# EAGLE board EsquematicoPractica1 (EAGLE 8.6.2), part 1 of 2
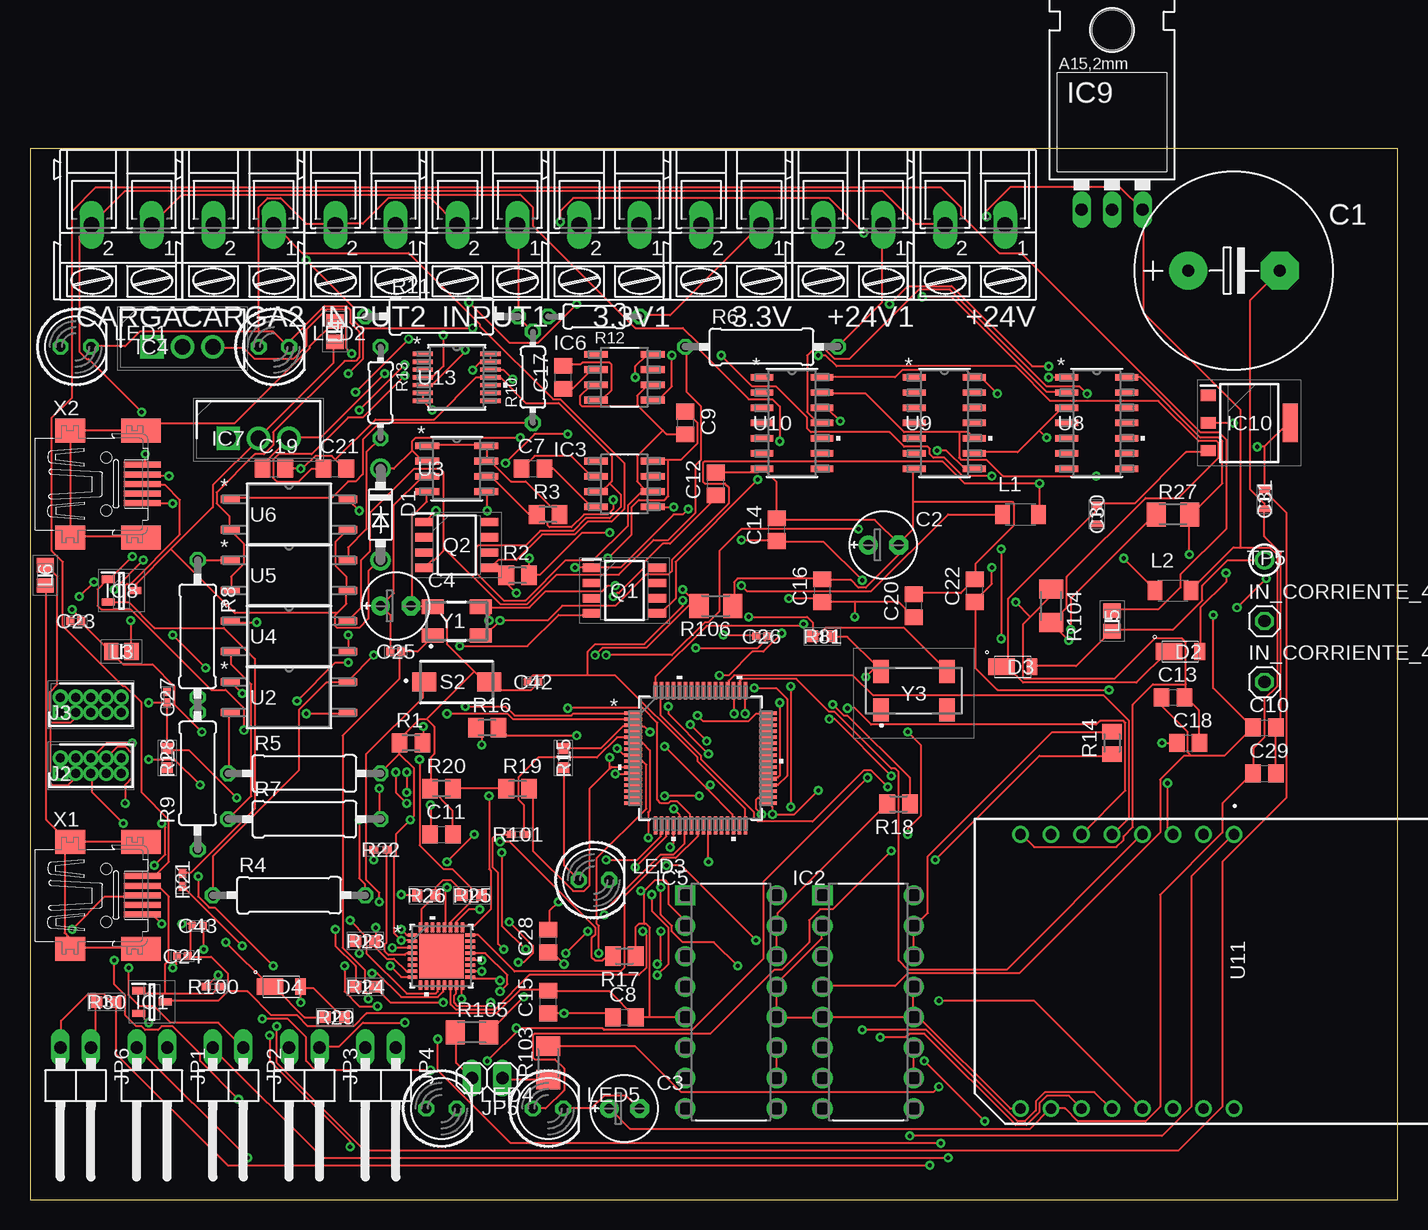
[diagram p0: board, top side]
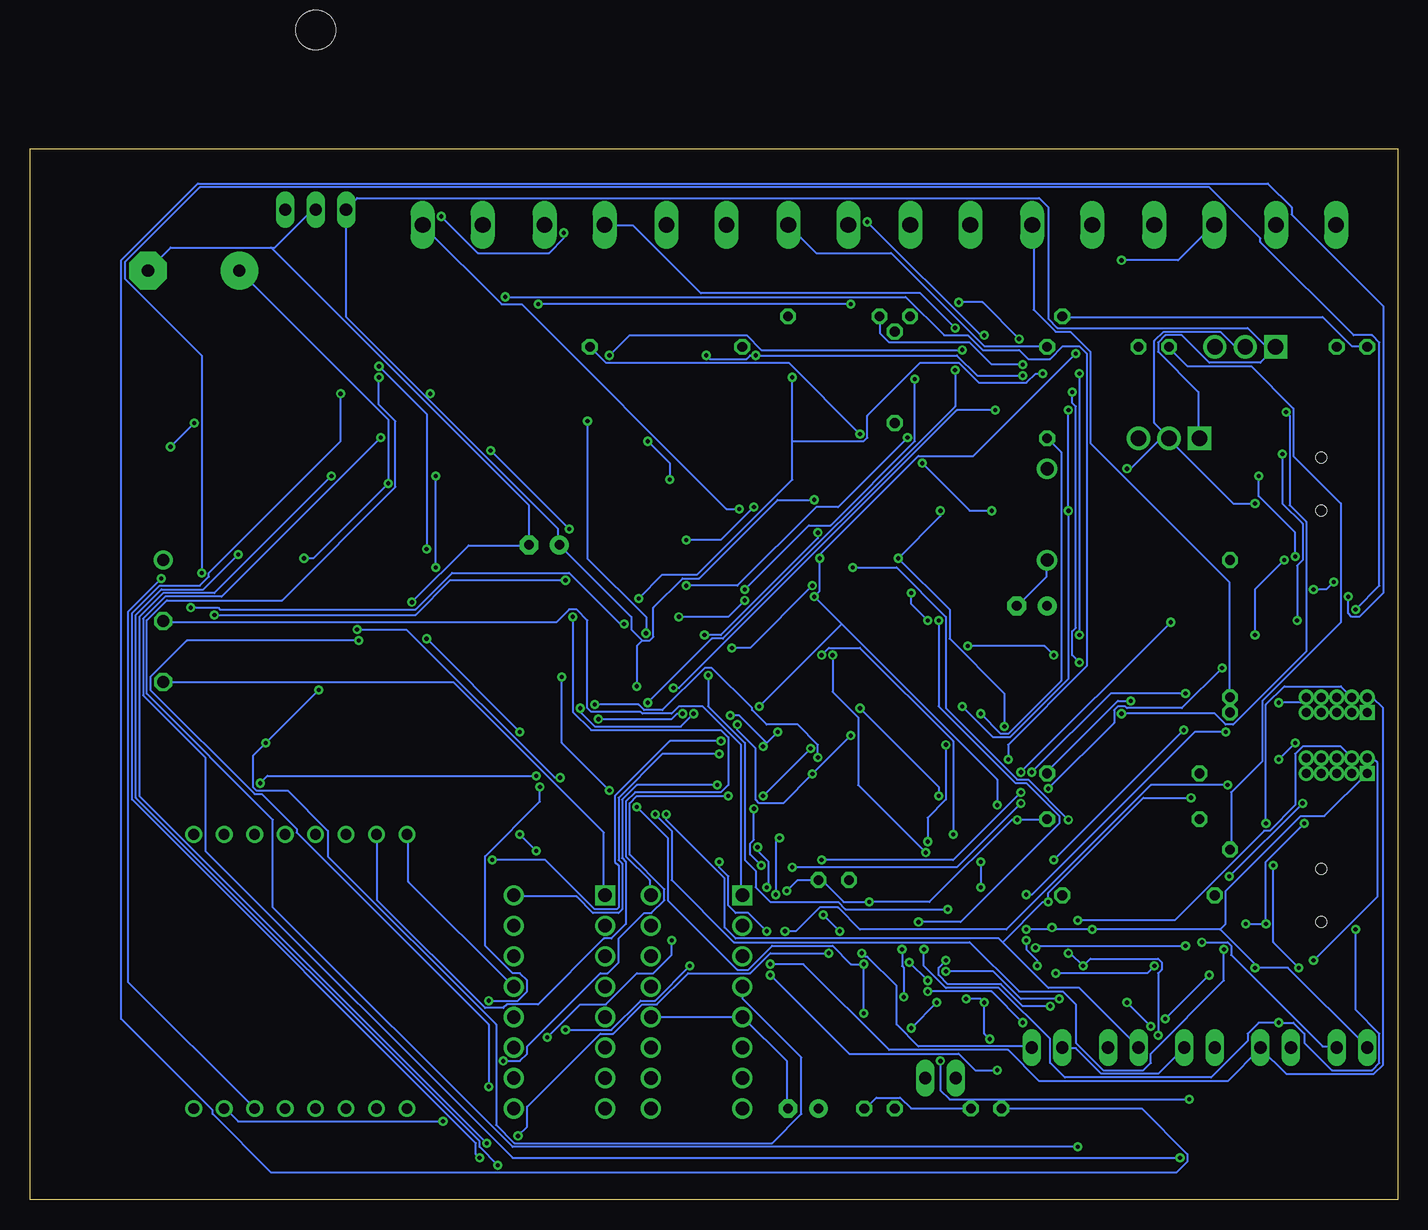
[diagram p1: board, bottom side, seen from below]

Size 113.97 x 87.62 mm. Coordinates in mm from the lower left corner, seen from the top.
Outline: 0,0 113.97,0 113.97,87.62 0,87.62 0,0
Copper layers (1*16): Top 0.035mm / dielectric 1.5mm / Bottom 0.035mm
Design rules "default": minimum track width 6mil, minimum drill 0.35mm, track to track 6mil, track to pad 6mil, pad to pad 6mil, via to via 6mil, smd to smd 6mil, copper to edge 40mil, drill to drill 6mil, minimum pad ring 10mil, minimum via ring 8mil, stop-mask expansion 4mil, vias tented up to drill 0mil, thermal gap 10mil

## Footprints (pad centres in the part's own frame; a part is rotated, then mirrored left to right if it is on the bottom)
AK300/2 = drill 1.321 long: 1 -2.515,0; 2 2.489,0
E7,5-16 = drill 1.016 pad 3.15: + -3.81,0 | drill 1.016 pad 3.15 octagon: - 3.81,0
E2,5-6E = drill 0.813 pad 1.575: + -1.27,0 | drill 0.813 pad 1.575 octagon: - 1.27,0
C0805 = smd 1.3 x 1.5: 1 -0.95,0; 2 0.95,0
CAPC1005X56N = smd 0.65 x 0.64: 1 -0.45,0; 2 0.45,0
CAPC1005X55N = smd 0.65 x 0.62: 1 -0.44,0; 2 0.44,0
CAPC1608X80N = smd 0.54 x 0.94: 1 -0.8,0; 2 0.8,0
CAPC1005X55N' = smd 0.6 x 0.62: 1 -0.46,0; 2 0.46,0
DO41-7.6 = drill 1.1 pad 1.7: A 3.81,0; C -3.81,0
POWERDI_123 = smd 2.2 x 1.4: 1 -1.6,0 | smd 0.9 x 1.4: 2 0.95,0
SOT95P248X115-3N = smd 1.1 x 0.6: 1 -1.1,0.95; 2 -1.1,-0.95; 3 1.1,0
DIP254P762X508-16 = drill 1.118 pad 1.676 square: 1 -7.62,17.78 | drill 1.118 pad 1.676: 2 -7.62,15.24; 3 -7.62,12.7; 4 -7.62,10.16; 5 -7.62,7.62; 6 -7.62,5.08; 7 -7.62,2.54; 8 -7.62,0; 9 0,0; 10 0,2.54; 11 0,5.08; 12 0,7.62; 13 0,10.16; 14 0,12.7; 15 0,15.24; 16 0,17.78
SOIC127P600X175-8N = smd 1.981 x 0.559: 1 -2.362,1.905; 2 -2.362,0.635; 3 -2.362,-0.635; 4 -2.362,-1.905; 5 2.362,-1.905; 6 2.362,-0.635; 7 2.362,0.635; 8 2.362,1.905
TO254P482X997X2018-3P = drill 1.29 pad 1.935 square: 1 0,0 | drill 1.29 pad 1.935: 2 2.54,0; 3 5.08,0
78XXL = drill 1.016 long: GND 0,-3.81; IN -2.54,-3.81; OUT 2.54,-3.81 | hole 3.302: 0,11.176
SOT230P700X180-4N = smd 1.25 x 0.95: 1 -3.4,2.3; 2 -3.4,0; 3 -3.4,-2.3 | smd 1.25 x 3.2: 4 3.4,0
1X01 = drill 1.016 octagon: 1 0,0
HDRV10W40P127_2X5_635X345X415P = drill 0.75 pad 1.15 square: 1 0,0 | drill 0.75 pad 1.15: 2 0,1.27; 3 1.27,0; 4 1.27,1.27; 5 2.54,0; 6 2.54,1.27; 7 3.81,0; 8 3.81,1.27; 9 5.08,0; 10 5.08,1.27
1X02/90 = drill 1.016 long: 1 -1.27,-3.81; 2 1.27,-3.81
1X02 = drill 1.016 long: 1 -1.27,0; 2 1.27,0
L3216C = smd 1.2 x 1.6: 1 -1.5,0; 2 1.5,0
INDC2012X105N = smd 1.2 x 1.45: 1 -0.85,0; 2 0.85,0
LED5MM = drill 0.813 octagon: A -1.27,0; K 1.27,0
SOIC127P600X175-8N' = smd 1.525 x 0.7: 1 -2.712,1.905; 2 -2.712,0.635; 3 -2.712,-0.635; 4 -2.712,-1.905; 5 2.712,-1.905; 6 2.712,-0.635; 7 2.712,0.635; 8 2.712,1.905
M0805 = smd 1.3 x 1.6: 1 -0.95,0; 2 0.95,0
0309/12 = drill 0.813 octagon: 1 -6.35,0; 2 6.35,0
0204/7 = drill 0.813 octagon: 1 -3.81,0; 2 3.81,0
RESC1608X55N = smd 0.9 x 0.95: 1 -0.8,0; 2 0.8,0
RESC1005X40N = smd 0.75 x 0.6: 1 -0.55,0; 2 0.55,0
RESC1608X50N = smd 0.85 x 1: 1 -0.75,0; 2 0.75,0
M1206 = smd 1.6 x 2: 1 -1.4,0; 2 1.4,0
EVQPE1 = smd 2 x 1.6: 1 -2.7,0; 2 2.7,0
5002 = drill 1.02 pad 1.6: 1 0,0
98ASS23234W = smd 1.473 x 0.279: 1 -5.613,3.75; 2 -5.613,3.25; 3 -5.613,2.75; 4 -5.613,2.25; 5 -5.613,1.75; 6 -5.613,1.25; 7 -5.613,0.75; 8 -5.613,0.25; 9 -5.613,-0.25; 10 -5.613,-0.75; 11 -5.613,-1.25; 12 -5.613,-1.75; 13 -5.613,-2.25; 14 -5.613,-2.75; 15 -5.613,-3.25; 16 -5.613,-3.75; 33 5.613,-3.75; 34 5.613,-3.25; 35 5.613,-2.75; 36 5.613,-2.25; 37 5.613,-1.75; 38 5.613,-1.25; 39 5.613,-0.75; 40 5.613,-0.25; 41 5.613,0.25; 42 5.613,0.75; 43 5.613,1.25; 44 5.613,1.75; 45 5.613,2.25; 46 5.613,2.75; 47 5.613,3.25; 48 5.613,3.75 | smd 0.279 x 1.473: 17 -3.75,-5.613; 18 -3.25,-5.613; 19 -2.75,-5.613; 20 -2.25,-5.613; 21 -1.75,-5.613; 22 -1.25,-5.613; 23 -0.75,-5.613; 24 -0.25,-5.613; 25 0.25,-5.613; 26 0.75,-5.613; 27 1.25,-5.613; 28 1.75,-5.613; 29 2.25,-5.613; 30 2.75,-5.613; 31 3.25,-5.613; 32 3.75,-5.613; 49 3.75,5.613; 50 3.25,5.613; 51 2.75,5.613; 52 2.25,5.613; 53 1.75,5.613; 54 1.25,5.613; 55 0.75,5.613; 56 0.25,5.613; 57 -0.25,5.613; 58 -0.75,5.613; 59 -1.25,5.613; 60 -1.75,5.613; 61 -2.25,5.613; 62 -2.75,5.613; 63 -3.25,5.613; 64 -3.75,5.613
SMD-4_VO-L = smd 1.549 x 0.61: 1 -4.902,1.27; 2 -4.902,-1.27; 3 4.902,-1.27; 4 4.902,1.27
D8 = smd 1.981 x 0.559: 1 -2.464,1.905; 2 -2.464,0.635; 3 -2.464,-0.635; 4 -2.464,-1.905; 5 2.464,-1.905; 6 2.464,-0.635; 7 2.464,0.635; 8 2.464,1.905
QFN-32_5X5X0.9 = smd 0.805 x 0.3: 1 -2.402,1.75; 2 -2.402,1.25; 3 -2.402,0.75; 4 -2.402,0.25; 5 -2.402,-0.25; 6 -2.402,-0.75; 7 -2.402,-1.25; 8 -2.402,-1.75; 17 2.402,-1.75; 18 2.402,-1.25; 19 2.402,-0.75; 20 2.402,-0.25; 21 2.402,0.25; 22 2.402,0.75; 23 2.402,1.25; 24 2.402,1.75 | smd 0.3 x 0.805: 9 -1.75,-2.402; 10 -1.25,-2.402; 11 -0.75,-2.402; 12 -0.25,-2.402; 13 0.25,-2.402; 14 0.75,-2.402; 15 1.25,-2.402; 16 1.75,-2.402; 25 1.75,2.402; 26 1.25,2.402; 27 0.75,2.402; 28 0.25,2.402; 29 -0.25,2.402; 30 -0.75,2.402; 31 -1.25,2.402; 32 -1.75,2.402 | smd 3.7 x 3.7: 33 0,0
SOT108-1 = smd 1.905 x 0.533: 1 -2.502,3.81; 2 -2.502,2.54; 3 -2.502,1.27; 4 -2.502,0; 5 -2.502,-1.27; 6 -2.502,-2.54; 7 -2.502,-3.81; 8 2.502,-3.81; 9 2.502,-2.54; 10 2.502,-1.27; 11 2.502,0; 12 2.502,1.27; 13 2.502,2.54; 14 2.502,3.81
MIKROE-971_1 = drill 0.889 pad 1.35: 1 -11.43,21.59; 2 -11.43,19.05; 3 -11.43,16.51; 4 -11.43,13.97; 5 -11.43,11.43; 6 -11.43,8.89; 7 -11.43,6.35; 8 -11.43,3.81; 9 11.43,3.81; 10 11.43,6.35; 11 11.43,8.89; 12 11.43,11.43; 13 11.43,13.97; 14 11.43,16.51; 15 11.43,19.05; 16 11.43,21.59
PW14 = smd 1.676 x 0.356: 1 -2.819,1.95; 2 -2.819,1.3; 3 -2.819,0.65; 4 -2.819,0; 5 -2.819,-0.65; 6 -2.819,-1.3; 7 -2.819,-1.95; 8 2.819,-1.95; 9 2.819,-1.3; 10 2.819,-0.65; 11 2.819,0; 12 2.819,0.65; 13 2.819,1.3; 14 2.819,1.95
32005-201 = smd 3.1 x 0.5: 1 3,1.6; 2 3,0.8; 3 3,0; 4 3,-0.8; 5 3,-1.6 | smd 2.5 x 2: M1 -3,-4.45; M2 -3,4.45 | smd 3.3 x 2: M3 2.9,4.45; M4 2.9,-4.45 | hole 0.9: 0,2.2; 0,-2.2
ABM3B = smd 1.8 x 1.2: 1 -2,-1.2; 2 2,-1.2; 3 2,1.2; 4 -2,1.2
ABS2532768KHZT = smd 1.3 x 1.9: 1 -2.75,-1.05; 2 2.75,-1.05; 3 2.75,2.15; 4 -2.75,2.15

## Placement (x,y rotation side)
3.3V  [AK300/2]  58.42,81.28 180 top
3.3V1  [AK300/2]  48.26,81.28 180 top
+24V  [AK300/2]  78.74,81.28 180 top
+24V1  [AK300/2]  68.58,81.28 180 top
C1  470uF  [E7,5-16]  100.33,77.47 0 top
C2  100uF  [E2,5-6E]  71.12,54.61 0 top
C3  100uF  [E2,5-6E]  49.53,7.62 0 top
C4  470pF  [E2,5-6E]  30.48,49.53 0 top
C7  10u  [C0805]  41.91,60.96 0 top
C8  0.33u  [C0805]  49.53,15.24 0 top
C9  0.1u  [C0805]  54.61,64.77 270 top
C10  10u  [C0805]  102.87,39.37 0 top
C11  1u  [C0805]  34.29,30.48 0 top
C12  0.1u  [C0805]  57.15,59.69 90 top
C13  1u  [C0805]  95.25,41.91 0 top
C14  0.1u  [C0805]  62.23,55.88 90 top
C15  0.33u  [C0805]  43.18,16.51 90 top
C16  0.1u  [C0805]  66.04,50.8 90 top
C17  10u  [C0805]  44.45,68.58 90 top
C18  10u  [C0805]  96.52,38.1 0 top
C19  1u  [C0805]  20.32,60.96 0 top
C20  0.1u  [C0805]  73.66,49.53 90 top
C21  1u  [C0805]  25.4,60.96 0 top
C22  0.1u  [C0805]  78.74,50.8 90 top
C23  0402ZD105KAT2A  [CAPC1005X56N]  3.81,48.26 0 top
C24  0402ZD105KAT2A  [CAPC1005X56N]  12.7,20.32 180 top
C25  04025A220JAT2A  [CAPC1005X56N]  30.48,45.72 180 top
C26  04025A220JAT2A  [CAPC1005X56N]  60.96,46.99 180 top
C27  C0402C104K8PAC  [CAPC1005X55N]  11.43,41.91 90 top
C28  0.33u  [C0805]  43.18,21.59 90 top
C29  0.1u  [C0805]  102.87,35.56 0 top
C30  C1608X5R1A106M080AC  [CAPC1608X80N]  88.9,57.15 90 top
C31  C1608X5R1A106M080AC  [CAPC1608X80N]  102.87,58.42 90 top
C42  12PF  [CAPC1005X55N']  41.91,43.18 0 top
C43  12PF  [CAPC1005X55N']  13.97,22.86 180 top
CARGA  [AK300/2]  7.62,81.28 180 top
CARGA2  [AK300/2]  17.78,81.28 180 top
D1  1N5819-B  [DO41-7.6]  29.21,57.15 270 top
D2  DFLS130L-7  [POWERDI_123]  96.52,45.72 0 top
D3  DFLS130L-7  [POWERDI_123]  82.55,44.45 0 top
D4  DFLS130L-7  [POWERDI_123]  21.59,17.78 0 top
IC1  GSOT05C-GS08  [SOT95P248X115-3N]  10.16,16.51 0 top
IC2  RCV420JP  [DIP254P762X508-16]  73.66,7.62 0 top
IC3  TC7662BEOA  [SOIC127P600X175-8N]  49.53,59.69 0 top
IC4  MC7812BTG  [TO254P482X997X2018-3P]  10.16,71.12 0 top
IC5  RCV420JP  [DIP254P762X508-16]  62.23,7.62 0 top
IC6  TC7662BEOA  [SOIC127P600X175-8N]  49.53,68.58 0 top
IC7  MC7812BTG  [TO254P482X997X2018-3P]  16.51,63.5 0 top
IC8  GSOT05C-GS08  [SOT95P248X115-3N]  7.62,50.8 0 top
IC9  [78XXL]  90.17,86.36 0 top
IC10  NCP1117ST33T3G  [SOT230P700X180-4N]  101.6,64.77 0 top
IN_CORRIENTE_4-1  [1X01]  102.87,48.26 0 top
IN_CORRIENTE_4-20  [1X01]  102.87,43.18 0 top
INPUT1  [AK300/2]  38.1,81.28 180 top
INPUT2  [AK300/2]  27.94,81.28 180 top
J2  M50-3500542  [HDRV10W40P127_2X5_635X345X415P]  2.54,35.56 0 top
J3  M50-3500542  [HDRV10W40P127_2X5_635X345X415P]  2.54,40.64 0 top
JP1  [1X02/90]  10.16,8.89 180 top
JP2  [1X02/90]  16.51,8.89 180 top
JP3  [1X02/90]  22.86,8.89 180 top
JP4  [1X02/90]  29.21,8.89 180 top
JP5  [1X02]  38.1,10.16 180 top
JP6  [1X02/90]  3.81,8.89 180 top
L1  220uH  [L3216C]  82.55,57.15 0 top
L2  1uH  [L3216C]  95.25,50.8 0 top
L3  MPZ2012S331A  [INDC2012X105N]  7.62,45.72 180 top
L4  MPZ2012S331A  [INDC2012X105N]  25.4,72.39 270 top
L5  MPZ2012S331A  [INDC2012X105N]  90.17,48.26 270 top
L6  MPZ2012S331A  [INDC2012X105N]  1.27,52.07 90 top
LED1  [LED5MM]  3.81,71.12 0 top
LED2  [LED5MM]  20.32,71.12 0 top
LED3  [LED5MM]  46.99,26.67 0 top
LED4  [LED5MM]  34.29,7.62 0 top
LED5  [LED5MM]  43.18,7.62 0 top
Q1  IRF7416PBF  [SOIC127P600X175-8N']  49.53,50.8 0 top
Q2  IRF7416PBF  [SOIC127P600X175-8N']  35.56,54.61 0 top
R1  1K  [M0805]  31.75,38.1 0 top
R2  1.64K  [M0805]  40.64,52.07 0 top
R3  0.33R  [M0805]  43.18,57.15 0 top
R4  10K  [0309/12]  21.59,25.4 0 top
R5  1K  [0309/12]  22.86,35.56 0 top
R6  10K  [0309/12]  60.96,71.12 0 top
R7  1K  [0309/12]  22.86,31.75 0 top
R8  220  [0309/12]  13.97,46.99 270 top
R9  1k  [0309/12]  13.97,35.56 90 top
R10  220  [0204/7]  41.91,68.58 90 top
R11  1k  [0309/12]  34.29,73.66 0 top
R12  10K  [0204/7]  46.99,73.66 180 top
R13  10K  [0204/7]  29.21,67.31 270 top
R14  10K  [M0805]  90.17,38.1 90 top
R15  RK73B1JTTD221J  [RESC1608X55N]  44.45,36.83 90 top
R16  10K  [M0805]  38.1,39.37 0 top
R17  10k  [M0805]  49.53,20.32 180 top
R18  10K  [M0805]  72.39,33.02 180 top
R19  10K  [M0805]  40.64,34.29 0 top
R20  10k  [M0805]  34.29,34.29 0 top
R21  33  [RESC1005X40N]  12.7,26.67 270 top
R22  33  [RESC1005X40N]  29.21,29.21 0 top
R23  RK73B1JLTD103J  [RESC1608X55N]  27.94,21.59 0 top
R24  RK73B1JLTD103J  [RESC1608X55N]  27.94,17.78 0 top
R25  RK73B1JLTD103J  [RESC1608X55N]  36.83,25.4 0 top
R26  CRCW06034K70JNEA  [RESC1608X50N]  33.02,25.4 0 top
R27  10K  [M1206]  95.25,57.15 0 top
R28  RK73B1JLTD103J  [RESC1608X55N]  11.43,36.83 90 top
R29  RK73Z1JTTD  [RESC1608X55N]  25.4,15.24 180 top
R30  RK73Z1JTTD  [RESC1608X55N]  6.35,16.51 0 top
R81  10M  [RESC1608X55N]  66.04,46.99 0 top
R100  33  [RESC1005X40N]  15.24,17.78 180 top
R101  33  [RESC1005X40N]  40.64,30.48 0 top
R103  6.7K  [M1206]  43.18,11.43 90 top
R104  3.3K  [M1206]  85.09,49.53 270 top
R105  5.7K  [M1206]  36.83,13.97 0 top
R106  3.3K  [M1206]  57.15,49.53 180 top
S2  EVQPE105K  [EVQPE1]  35.56,43.18 0 top
TP5  5002  [5002]  102.87,53.34 0 top
U1  MKL27Z64VLH4  [98ASS23234W]  55.88,36.83 0 top
U2  SFH6156-4TSMD-4_VO-L  [SMD-4_VO-L]  21.59,41.91 0 top
U3  MC34063ADR  [D8]  35.56,60.96 0 top
U4  SFH6156-4TSMD-4_VO-L  [SMD-4_VO-L]  21.59,46.99 0 top
U5  SFH6156-4TSMD-4_VO-L  [SMD-4_VO-L]  21.59,52.07 0 top
U6  SFH6156-4TSMD-4_VO-L  [SMD-4_VO-L]  21.59,57.15 0 top
U7  MK20DX128VFM5  [QFN-32_5X5X0.9]  34.29,20.32 0 top
U8  74LVC125AD  [SOT108-1]  88.9,64.77 0 top
U9  74LVC125AD  [SOT108-1]  76.2,64.77 0 top
U10  74LVC125AD  [SOT108-1]  63.5,64.77 0 top
U11  MIKROE-971  [MIKROE-971_1]  78.74,19.05 270 top
U13  TLV274QPWRG4Q1  [PW14]  35.56,68.58 0 top
X1  MINI-USB-SCHIELD-32005-201  [32005-201]  6.35,25.4 0 top
X2  MINI-USB-SCHIELD-32005-201  [32005-201]  6.35,59.69 0 top
Y1  ABM3B-8.000MHZ-B2-T  [ABM3B]  35.56,48.26 0 top
Y3  32.768KHZ  [ABS2532768KHZT]  73.66,41.91 0 top

## Library data of the parts
3.3V 3.3V1 +24V +24V1 CARGA CARGA2 INPUT1 INPUT2 = con-ptr500; OC_FARNELL: unknown; OC_NEWARK: unknown
C1-C4 L1 L2 = rcl
C7-C22 C28 C29 = rcl; SPICEPREFIX: C
C23 C24 = 0402ZD105KAT2A; DESCRIPTION: AVX - 0402ZD105KAT2A - CAP, MLCC, X5R, 1UF, 10V, 0402; HEIGHT: 0.56mm; MANUFACTURER_NAME: AVX; MANUFACTURER_PART_NUMBER: 0402ZD105KAT2A; RS_PART_NUMBER: 8882699; RS_PRICE/STOCK: http://uk.rs-online.com/web/p/products/8882699
C25 C26 = 04025A220JAT2A; DESCRIPTION: Capacitor MLCC 0402 22pF 50V AVX 0402 Standard 22pF Ceramic Multilayer Capacitor, 50 V dc C0G Dielectric 5% SMD; HEIGHT: 0.56mm; MANUFACTURER_NAME: AVX; MANUFACTURER_PART_NUMBER: 04025A220JAT2A; RS_PART_NUMBER: 1243267; RS_PRICE/STOCK: http://uk.rs-online.com/web/p/products/1243267
C27 = C0402C104K8PAC; DESCRIPTION: Multilayer Ceramic Capacitors MLCC - SMD/SMT 10volts 0.1uF 10% X5R; HEIGHT: 0.55mm; MANUFACTURER_NAME: Kemet; MANUFACTURER_PART_NUMBER: C0402C104K8PAC
C30 C31 = C1608X5R1A106M080AC; DESCRIPTION: TDK - C1608X5R1A106M080AC - CAP, MLCC, X5R, 10UF, 10V, 0603; HEIGHT: 0.8mm; MANUFACTURER_NAME: TDK; MANUFACTURER_PART_NUMBER: C1608X5R1A106M080AC; RS_PART_NUMBER: 9159117; RS_PRICE/STOCK: http://uk.rs-online.com/web/p/products/9159117
C42 C43 = GRM1555C1H120JA01D; DESCRIPTION: Ceramic SMT capacitor 12pF 50Vdc Murata 0402 GRM 12pF Ceramic Multilayer Capacitor, 50 V dc C0G Dielectric 5%; HEIGHT: 0.55mm; MANUFACTURER_NAME: Murata Electronics; MANUFACTURER_PART_NUMBER: GRM1555C1H120JA01D; RS_PART_NUMBER: 7235367; RS_PRICE/STOCK: http://uk.rs-online.com/web/p/products/7235367
D1 = diode
D2-D4 = DFLS130L-7; DESCRIPTION: 1.0A SURFACE MOUNT SCHOTTKY BARRIER RECTIFIER; HEIGHT: mm; MANUFACTURER_NAME: Diodes Inc.; MANUFACTURER_PART_NUMBER: DFLS130L-7; RS_PART_NUMBER: 9228351; RS_PRICE/STOCK: http://uk.rs-online.com/web/p/products/9228351
IC1 IC8 = GSOT05C-GS08; DESCRIPTION: VISHAY - GSOT05C-GS08 - TVS DIODE ARRAY, 504W, 5V, SOT-23, FULL REEL; HEIGHT: 1.15mm; MANUFACTURER_NAME: Vishay; MANUFACTURER_PART_NUMBER: GSOT05C-GS08
IC2 IC5 = RCV420JP; DESCRIPTION: Texas Instruments RCV420JP, Current Loop Receiver 11.4 - 36 V 16-Pin PDIP; HEIGHT: mm; MANUFACTURER_NAME: Texas Instruments; MANUFACTURER_PART_NUMBER: RCV420JP; RS_PART_NUMBER: 6606626P; RS_PRICE/STOCK: http://uk.rs-online.com/web/p/products/6606626P
IC3 IC6 = TC7662BEOA; DESCRIPTION: DC-TO-DC VOLTAGE CONVERTER; HEIGHT: mm; MANUFACTURER_NAME: Microchip; MANUFACTURER_PART_NUMBER: TC7662BEOA; RS_PART_NUMBER: 7386269; RS_PRICE/STOCK: http://uk.rs-online.com/web/p/products/7386269
IC4 IC7 = MC7812BTG; ALLIED_NUMBER: 70100558; ALLIED_PRICE/STOCK: http://www.alliedelec.com/on-semiconductor-mc7812btg/70100558/; DESCRIPTION: Linear Voltage Regulators 12V 1A Postive; HEIGHT: 4.82mm; MANUFACTURER_NAME: ON Semiconductor; MANUFACTURER_PART_NUMBER: MC7812BTG; RS_PART_NUMBER: 0463454P; RS_PRICE/STOCK: http://uk.rs-online.com/web/p/products/0463454P
IC9 = v-reg
IC10 = NCP1117ST33T3G; ALLIED_NUMBER: 70340559; ALLIED_PRICE/STOCK: http://www.alliedelec.com/on-semiconductor-ncp1117st33t3g/70340559/; DESCRIPTION: ON SEMICONDUCTOR - NCP1117ST33T3G - IC, LINEAR VOLTAGE REGULATOR; HEIGHT: 1.8mm; MANUFACTURER_NAME: ON Semiconductor; MANUFACTURER_PART_NUMBER: NCP1117ST33T3G; RS_PART_NUMBER: 7857207P; RS_PRICE/STOCK: http://uk.rs-online.com/web/p/products/7857207P
IN_CORRIENTE_4-1 IN_CORRIENTE_4-20 JP1-JP6 = pinhead
J2 J3 = M50-3500542; DESCRIPTION: Header 2x5way DIL VERT Pin HARWIN M50-35 Series, 1.27mm Pitch 10 Way 2 Row Straight PCB Header, Solder Termination, 1A; HEIGHT: 4.15mm; MANUFACTURER_NAME: HARWIN; MANUFACTURER_PART_NUMBER: M50-3500542; RS_PART_NUMBER: 6811184P; RS_PRICE/STOCK: http://uk.rs-online.com/web/p/products/6811184P
L3-L6 = MPZ2012S331AT000; DESCRIPTION: Ferrite Beads Multi-Layer Power 330Ohm 25% 100MHz 2.5A 50mOhm DCR 0805 T/R; HEIGHT: 1.05mm; MANUFACTURER_NAME: TDK; MANUFACTURER_PART_NUMBER: MPZ2012S331AT000
LED1-LED5 = led
Q1 Q2 = IRF7416PBF_Completo; DESCRIPTION: MOSFET P-Channel 30V 10A HEXFET SOIC8 Infineon IRF7416PBF P-channel MOSFET Transistor, 10 A, 30 V, 8-Pin SOIC; HEIGHT: 1.75mm; MANUFACTURER_NAME: Infineon; MANUFACTURER_PART_NUMBER: IRF7416PBF; RS_PART_NUMBER: 5410143; SUPPLIER_NAME: RS
R1-R14 R16-R20 R27 R103-R106 = rcl; SPICEPREFIX: R
R15 = RK73B1JTTD221J; DESCRIPTION: Thick Film Resistors - SMD 1/10watts 220ohms 5%; HEIGHT: 0.55mm; MANUFACTURER_NAME: KOA Speer; MANUFACTURER_PART_NUMBER: RK73B1JTTD221J
R21 R22 R100 R101 = RC0402FR-0733RL; DESCRIPTION: YAGEO (PHYCOMP) - RC0402FR-0733RL - RES, THICK FILM, 33R, 1%, 0.0625W, 0402; HEIGHT: 0.4mm; MANUFACTURER_NAME: YAGEO (PHYCOMP); MANUFACTURER_PART_NUMBER: RC0402FR-0733RL
R23-R25 R28 = RK73B1JLTD103J; DESCRIPTION: Thick Film Resistors - SMD 1/10watts 10Kohms 5%; HEIGHT: 0.55mm; MANUFACTURER_NAME: KOA Speer; MANUFACTURER_PART_NUMBER: RK73B1JLTD103J
R26 = CRCW06034K70JNEA; DESCRIPTION: Vishay CRCW Series Thick Film Surface Mount Resistor 0603 Case 4.7k 5% 0.1W 200ppm/K; HEIGHT: 0.5mm; MANUFACTURER_NAME: Vishay; MANUFACTURER_PART_NUMBER: CRCW06034K70JNEA; RS_PART_NUMBER: 8306488; RS_PRICE/STOCK: https://uk.rs-online.com/web/p/products/8306488
R29 R30 = RK73Z1JTTD; DESCRIPTION: Resistor,ThickFilm1608,1A,50mohm; HEIGHT: 0.55mm; MANUFACTURER_NAME: KOA Speer; MANUFACTURER_PART_NUMBER: RK73Z1JTTD; RS_PART_NUMBER: 6315667P; RS_PRICE/STOCK: http://uk.rs-online.com/web/p/products/6315667P
R81 = RK73H1JLTD1005F; DESCRIPTION: Thick Film Resistors - SMD 1/10watts 10Mohms 1%; HEIGHT: 0.55mm; MANUFACTURER_NAME: KOA Speer; MANUFACTURER_PART_NUMBER: RK73H1JLTD1005F
S2 = EVQPE105K; DESCRIPTION: Tact switch,SMT,SPST,black,1.0N op force Black Push Plate Tactile Switch, SPST-NO 50 mA 5mm; HEIGHT: mm; MANUFACTURER_NAME: Panasonic; MANUFACTURER_PART_NUMBER: EVQPE105K; RS_PART_NUMBER: 7561669; RS_PRICE/STOCK: http://uk.rs-online.com/web/p/products/7561669
TP5 = 5002; ALLIED_NUMBER: 70799413; ALLIED_PRICE/STOCK: http://www.alliedelec.com/keystone-electronics-5002/70799413/; DESCRIPTION: KEYSTONE - 5002 - TEST POINT CONNECTOR; HEIGHT: mm; MANUFACTURER_NAME: Keystone Electronics; MANUFACTURER_PART_NUMBER: 5002; RS_PART_NUMBER: 2508838443; RS_PRICE/STOCK: http://uk.rs-online.com/web/p/products/2508838443
U1 = KL27; MANUFACTURER_PART_NUMBER: mkl27z64vlh4; VENDOR: Freescale
U2 U4-U6 = SFH6156-4T; MANUFACTURER_PART_NUMBER: SFH61564T; VENDOR: Vishay
U3 = MC34063ADR; MANUFACTURER_PART_NUMBER: MC34063ADR; VENDOR: Texas Instruments
U7 = MK20DX128VFM5; CPU: ARM Cortex-M4; FLASHKB: 128; MANUFACTURER_PART_NUMBER: mk20dx128vfm5; MAXFREQUENCY: 50; PINCOUNT: 32; SRAMKB: 16; VENDOR: FREESCALE
U8-U10 = 74LVC125ADB; MANUFACTURER_PART_NUMBER: 74LVC125AD; VENDOR: NXP
U11 = MIKROE-971; DESCRIPTION: MIKROELEKTRONIKA - MIKROE-971 - ADD-ON-BOARD, ETH CLICK MIKROBUS; HEIGHT: mm; MANUFACTURER_NAME: MIKROELEKTRONIKA; MANUFACTURER_PART_NUMBER: MIKROE-971; RS_PART_NUMBER: 7916432; RS_PRICE/STOCK: http://uk.rs-online.com/web/p/products/7916432
U13 = TLV274QPWRG4Q1; MANUFACTURER_PART_NUMBER: TLV274QPWRG4Q1; VENDOR: Texas Instruments
X1 X2 = con-cypressindustries; OC_FARNELL: unknown; OC_NEWARK: unknown
Y1 = ABM3B-8.000MHZ-B2-T; DESCRIPTION: ABRACON - ABM3B-8.000MHZ-B2-T - CRYSTAL, 8MHZ, 18PF, 5 X 3.2MM; HEIGHT: mm; MANUFACTURER_NAME: ABRACON; MANUFACTURER_PART_NUMBER: ABM3B-8.000MHZ-B2-T
Y3 = ABS25-32.768KHZ-T; DESCRIPTION: ABRACON - ABS25-32.768KHZ-T - CRYSTAL, 32.768K, 12.5PF CL 8X2.5 SMD; HEIGHT: 2mm; MANUFACTURER_NAME: ABRACON; MANUFACTURER_PART_NUMBER: ABS25-32.768KHZ-T

## Nets
+3V3: R15.2 U1.3 U1.30 U1.48 U11.7
+5V: C3.+ C29.1 IC9.OUT L2.2 U11.10 U13.4
ADC0_DM0_IN_A4-20: R18.1 R19.2 U1.10
ADC0_DP3_IN_A4-20: R14.1 R16.2 U1.11
EXTAL_32KHZ: C42.1 R81.1 U1.32 Y3.3
GND: C1.- C2.- C3.- C4.- C8.2 C9.2 C10.2 C11.2 C12.2 C13.2 C14.2 C15.2 C16.2 C18.2 C19.2 C20.2 C21.2 C22.2 C24.1 C28.2 C29.2 C31.1 C42.2 C43.2 D1.A IC1.3 IC2.2 IC2.5 IC2.12 IC2.13 IC3.3 IC3.6 IC4.2 IC5.2 IC5.5 IC5.12 IC5.13 IC6.3 IC6.6 IC7.2 IC8.3 IC9.GND J2.3 J2.5 J3.3 L4.2 L6.2 LED3.K LED4.K LED5.K R1.1 R17.1 R20.1 R104.1 R106.1 S2.2 U3.4 U5.3 U6.3 U7.2 U7.8 U9.7 U10.7 U11.8 U11.9 U13.11 X1.5 X2.5 Y1.4
I2C0_SCL: U1.20 U11.12
I2C0_SDA: U1.21 U11.11
KL27_SWD_CLK: JP4.1 U1.22
LPUART0_RX_MKB: U1.63 U11.13
LPUART0_TX_MKB: U1.64 U11.14
N$1: Q1.4 R4.1 U2.4
N$2: D1.C L1.1 U3.2
N$3: C1.+ L1.2 L2.1 R2.1 Y1.2
N$4: C4.+ C25.2 U3.3
N$5: R5.1 U2.2
N$6: CARGA.1 Q1.5
N$7: C26.2 R1.2 R2.2 U3.5
N$8: +24V.1 Q1.1 R4.2
N$9: R3.2 U3.1 U3.7 U3.8
N$10: +24V.2 CARGA.2 U2.3
N$11: Q2.4 R6.1 U4.4
N$12: +24V1.1 Q2.1 R6.2
N$13: R7.1 U4.2
N$14: CARGA2.1 Q2.5
N$15: +24V1.2 CARGA2.2 U4.3
N$16: INPUT2.1 R8.2 R9.2
N$17: R8.1 U5.1
N$18: LED2.A R9.1
N$19: JP5.1 R103.1
N$20: 3.3V1.1 R13.1
N$21: INPUT1.1 R10.2 R11.2
N$22: R10.1 U6.1
N$23: 3.3V.1 R12.1
N$24: LED1.A R11.1
N$25: INPUT1.2 INPUT2.2 LED1.K LED2.K U5.2 U6.2
N$26: LED3.A R15.1
N$27: C7.1 IC3.2
N$28: JP5.2 R105.1
N$29: C9.1 C11.1 C12.1 IC2.16 IC3.8 IC4.3
N$30: C7.2 IC3.4
N$31: IC2.10 IC2.11
N$32: C30.2 D2.1 D3.1 IC10.3
N$33: C10.1 C13.1 C14.1 IC2.4 IC3.5
N$34: R16.1 R17.2
N$35: IC2.14 IC2.15 R14.2
N$36: IC2.1 IN_CORRIENTE_4-20.1
N$37: C16.1 C19.1 C20.1 IC5.16 IC6.8 IC7.3
N$38: C17.1 IC6.2
N$39: C17.2 IC6.4
N$40: C18.1 C21.1 C22.1 IC5.4 IC6.5
N$41: IC5.10 IC5.11
N$42: IC5.14 IC5.15 R18.2
N$43: C31.2 D4.2 IC10.2 IC10.4 R29.1
N$44: R19.1 R20.2
N$45: IC5.1 IN_CORRIENTE_4-1.1
N$46: IC8.2 R21.1 X2.3
N$47: L3.1 X2.1
N$48: IC8.1 R22.1 X2.2
N$49: L4.1 X2.M1 X2.M2 X2.M3 X2.M4
N$50: C23.1
N$51: C25.1 U7.18 Y1.1
N$52: U8.7
N$53: U7.29
N$54: JP2.2 U10.11
N$55: R25.1 R26.2 U7.32
N$56: R25.2
N$57: C27.2
N$58: JP1.2 U8.3 U9.9
N$59: LED4.A R7.2
N$60: LED5.A R5.2
N$62: C30.1
N$63: D4.1 JP6.1 R29.2 R30.1
N$69: IC10.1
N$71: IC1.2 R101.1 X1.3
N$72: L5.1 X1.1
N$73: IC1.1 R100.1 X1.2
N$74: L6.1 X1.M1 X1.M2 X1.M3 X1.M4
N$76: R103.2 R104.2 U13.5
N$78: R105.2 R106.2 U13.12
P3V3_JMP2: R28.1
P3V3_KL27Z: J3.1
P3V3_SDA: C24.2 J2.1 JP6.2 R23.2 R24.1 R27.2 R30.2 U7.1 U7.7 U8.14
P5V_KL27Z: D3.2 L5.2 TP5.1
P5V_SDA: C23.2 D2.2 L3.2 R26.1
PIN_INT: U1.8 U11.15
PTA20_RST: U11.2
PTB1_IN_OA: U1.36 U13.6 U13.7
PTB2_IN_OA: U1.37 U13.13 U13.14
PTE0_D1_IN: R12.2 U1.1 U6.4
PTE1_D2_IN: R13.2 U1.2 U5.4
PTE20_A0: U1.9 U11.1
PTE30_D1_OUT: U1.18 U4.1
PTE31_D2_OUT: U1.19 U2.1
RST_K20D50_B: C27.1 J3.10 JP3.2 R28.2 S2.1 U1.34
SDA_JTAG_TCLK: J2.4 U7.12
SDA_JTAG_TDI: J2.8 U7.13
SDA_JTAG_TDO: J2.6 U7.14
SDA_JTAG_TMS: J2.2 R27.1 U7.15
SDA_P17: C26.1 U7.17 Y1.3
SDA_P20: R23.1 U7.20 U8.1
SDA_P21: JP3.1 U7.21
SDA_P26: U7.26 U10.12
SDA_P27: U7.27 U8.2
SDA_P28: U7.28 U9.8
SDA_RST_B: J2.10
SDA_SWD_EN: R24.2 U7.16 U9.10 U10.13
SPI0_MISO: U1.52 U11.5
SPI0_MOSI: U1.51 U11.6
SPI0_PCS0: U1.49 U11.3
SPI0_SCK: U1.50 U11.4
SWD_CLK_TGTMCU: J3.4 JP2.1 JP4.2
SWD_DIO_TGTMCU: J3.2 JP1.1 U1.26
TPM0_CH2_PWM: U1.17
UART1_RX_TGTMCU: U1.23 U7.25
UART1_TX_TGTMCU: U1.24 U7.24
USB_DM: R100.2 U1.6
USB_DM1: R22.2 U7.4
USB_DP: R101.2 U1.5
USB_DP1: R21.2 U7.3
USB_VDD: U1.7
VBAT: U7.11
VCC: C2.+ C8.1 C15.1 C28.1 IC4.1 IC7.1 IC9.IN R3.1 U3.6 U9.14 U10.14
VDDA: U1.13
VREF/VREFO: U1.14
VREFL: U1.15
VSS: U1.47
VSS_2: U1.4
VSS_3: U1.31
VSSA: U1.16
XTAL_32KHZ: C43.1 R81.2 U1.33 Y3.4